# Altium PCB rpi_adapter_mipi_in_out.PcbDoc (part 2 of 2)
Units mil, origin at the board's own origin, x right, y up, seen from the top; angles counter-clockwise.
Board outline 1339.12 x 1250 mil, 4 copper layers (Top Layer, L02_GND, L03_GND, Bottom Layer), stack 36.268 mil thick; 12 components, 26 nets, 96 pads, 205 vias.
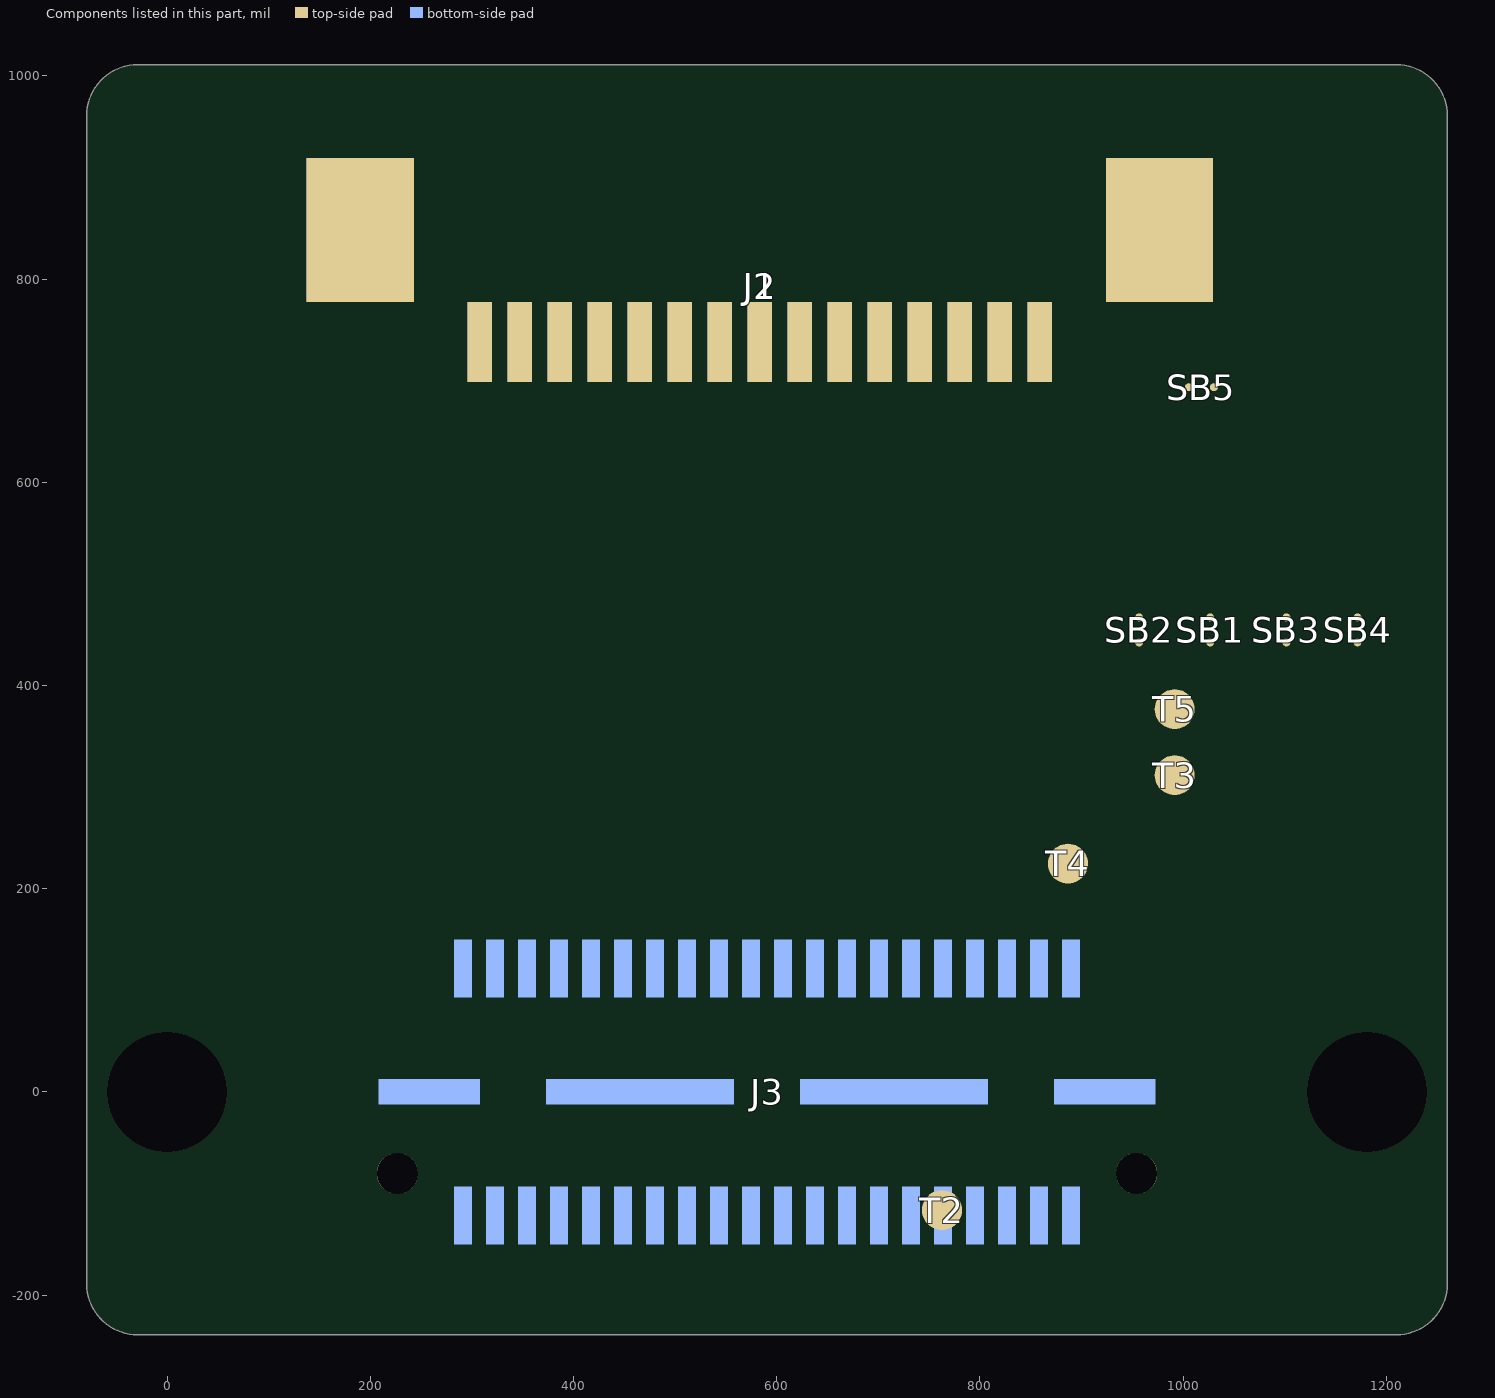
[diagram p4: the components of this part, seen from the top]

## Keep-outs (continued)
L03_GND:
  region: 810.85,490.51 810.85,528.55 810.93,530.3 811.16,532.02 811.54,533.72 812.06,535.39 812.73,537.01 813.53,538.55 814.47,540.02 815.53,541.41 816.71,542.69 818,543.86 819.38,544.94 820.85,545.86 822.4,546.68 824.01,547.35 825.68,547.86 827.38,548.26 829.11,548.47 830.85,548.55 832.6,548.47 834.33,548.26 836.03,547.86 837.69,547.35 839.31,546.68 840.85,545.86 842.33,544.94 843.71,543.86 845,542.69 846.17,541.41 847.24,540.02 848.17,538.55 848.98,537.01 849.65,535.39 850.17,533.72 850.55,532.02 850.78,530.3 850.85,528.55 850.85,490.51 850.78,488.76 850.55,487.02 850.17,485.32 849.65,483.66 848.98,482.05 848.17,480.51 847.24,479.02 846.17,477.64 845,476.36 843.71,475.18 842.33,474.11 840.85,473.18 839.31,472.36 837.69,471.7 836.03,471.18 834.33,470.8 832.6,470.59 830.85,470.51 829.11,470.59 827.38,470.8 825.68,471.18 824.01,471.7 822.4,472.36 820.85,473.18 819.38,474.11 818,475.18 816.71,476.36 815.53,477.64 814.47,479.02 813.53,480.51 812.73,482.05 812.06,483.66 811.54,485.32 811.16,487.02 810.93,488.76 810.85,490.51
  region: 694.85,435.51 694.85,473.55 694.93,475.3 695.16,477.02 695.54,478.72 696.06,480.39 696.73,482.01 697.53,483.55 698.47,485.02 699.53,486.41 700.71,487.69 702,488.86 703.38,489.94 704.85,490.86 706.4,491.68 708.01,492.35 709.68,492.86 711.38,493.26 713.11,493.47 714.85,493.55 716.6,493.47 718.33,493.26 720.03,492.86 721.69,492.35 723.31,491.68 724.85,490.86 726.33,489.94 727.71,488.86 729,487.69 730.17,486.41 731.24,485.02 732.17,483.55 732.98,482.01 733.65,480.39 734.17,478.72 734.55,477.02 734.78,475.3 734.85,473.55 734.85,435.51 734.78,433.76 734.55,432.02 734.17,430.32 733.65,428.66 732.98,427.05 732.17,425.51 731.24,424.02 730.17,422.64 729,421.36 727.71,420.18 726.33,419.11 724.85,418.18 723.31,417.36 721.69,416.7 720.03,416.18 718.33,415.8 716.6,415.59 714.85,415.51 713.11,415.59 711.38,415.8 709.68,416.18 708.01,416.7 706.4,417.36 704.85,418.18 703.38,419.11 702,420.18 700.71,421.36 699.53,422.64 698.47,424.02 697.53,425.51 696.73,427.05 696.06,428.66 695.54,430.32 695.16,432.02 694.93,433.76 694.85,435.51
  region: 491.8,697.65 517.82,697.65 517.82,778.39 491.8,778.39
  region: 690.72,92.1 710.83,92.1 710.83,151.19 690.72,151.19
  region: 470.25,-151.2 490.36,-151.2 490.36,-92.11 470.25,-92.11
  region: 501.75,-151.2 521.86,-151.2 521.86,-92.11 501.75,-92.11
  region: 501.75,92.1 521.86,92.1 521.86,151.19 501.75,151.19
  region: 375.76,-151.2 395.87,-151.2 395.87,-92.11 375.76,-92.11
  region: 609.91,697.65 635.93,697.65 635.93,778.39 609.91,778.39
  region: 382.56,-160.11 420.61,-160.11 422.36,-160.19 424.08,-160.41 425.79,-160.8 427.45,-161.32 429.06,-161.99 430.61,-162.78 432.07,-163.73 433.47,-164.78 434.74,-165.97 435.92,-167.26 436.99,-168.64 437.92,-170.11 438.73,-171.66 439.4,-173.27 439.92,-174.94 440.31,-176.64 440.54,-178.36 440.61,-180.11 440.54,-181.86 440.31,-183.59 439.92,-185.28 439.4,-186.95 438.73,-188.57 437.92,-190.11 436.99,-191.59 435.92,-192.97 434.74,-194.26 433.47,-195.43 432.07,-196.49 430.61,-197.43 429.06,-198.24 427.45,-198.91 425.79,-199.43 424.08,-199.81 422.36,-200.03 420.61,-200.11 382.56,-200.11 380.81,-200.03 379.08,-199.81 377.38,-199.43 375.72,-198.91 374.11,-198.24 372.56,-197.43 371.08,-196.49 369.71,-195.43 368.41,-194.26 367.23,-192.97 366.17,-191.59 365.23,-190.11 364.42,-188.57 363.76,-186.95 363.23,-185.28 362.86,-183.59 362.64,-181.86 362.56,-180.11 362.64,-178.36 362.86,-176.64 363.23,-174.94 363.76,-173.27 364.42,-171.66 365.23,-170.11 366.17,-168.64 367.23,-167.26 368.41,-165.97 369.71,-164.78 371.08,-163.73 372.56,-162.78 374.11,-161.99 375.72,-161.32 377.38,-160.8 379.08,-160.41 380.81,-160.19 382.56,-160.11
  region: 477.04,-160.11 515.09,-160.11 516.84,-160.19 518.56,-160.41 520.27,-160.8 521.93,-161.32 523.54,-161.99 525.09,-162.78 526.55,-163.73 527.95,-164.78 529.22,-165.97 530.4,-167.26 531.47,-168.64 532.4,-170.11 533.21,-171.66 533.88,-173.27 534.4,-174.94 534.79,-176.64 535.02,-178.36 535.09,-180.11 535.02,-181.86 534.79,-183.59 534.4,-185.28 533.88,-186.95 533.21,-188.57 532.4,-190.11 531.47,-191.59 530.4,-192.97 529.22,-194.26 527.95,-195.43 526.55,-196.49 525.09,-197.43 523.54,-198.24 521.93,-198.91 520.27,-199.43 518.56,-199.81 516.84,-200.03 515.09,-200.11 477.04,-200.11 475.29,-200.03 473.56,-199.81 471.86,-199.43 470.2,-198.91 468.59,-198.24 467.04,-197.43 465.56,-196.49 464.19,-195.43 462.89,-194.26 461.71,-192.97 460.65,-191.59 459.71,-190.11 458.9,-188.57 458.24,-186.95 457.71,-185.28 457.34,-183.59 457.12,-181.86 457.04,-180.11 457.12,-178.36 457.34,-176.64 457.71,-174.94 458.24,-173.27 458.9,-171.66 459.71,-170.11 460.65,-168.64 461.71,-167.26 462.89,-165.97 464.19,-164.78 465.56,-163.73 467.04,-162.78 468.59,-161.99 470.2,-161.32 471.86,-160.8 473.56,-160.41 475.29,-160.19 477.04,-160.11
  region: 533.83,402.22 533.83,364.16 533.75,362.41 533.52,360.69 533.14,358.98 532.62,357.32 531.95,355.72 531.15,354.16 530.21,352.7 529.15,351.3 527.97,350.03 526.68,348.85 525.3,347.78 523.83,346.85 522.28,346.05 520.67,345.38 519,344.85 517.3,344.47 515.57,344.23 513.83,344.16 512.08,344.23 510.35,344.47 508.65,344.85 506.99,345.38 505.37,346.05 503.83,346.85 502.35,347.78 500.97,348.85 499.68,350.03 498.51,351.3 497.44,352.7 496.51,354.16 495.7,355.72 495.03,357.32 494.51,358.98 494.13,360.69 493.9,362.41 493.83,364.16 493.83,402.22 493.9,403.97 494.13,405.69 494.51,407.39 495.03,409.05 495.7,410.66 496.51,412.22 497.44,413.69 498.51,415.06 499.68,416.36 500.97,417.55 502.35,418.6 503.83,419.55 505.37,420.35 506.99,421.01 508.65,421.55 510.35,421.91 512.08,422.14 513.83,422.22 515.57,422.14 517.3,421.91 519,421.55 520.67,421.01 522.28,420.35 523.83,419.55 525.3,418.6 526.68,417.55 527.97,416.36 529.15,415.06 530.21,413.69 531.15,412.22 531.95,410.66 532.62,409.05 533.14,407.39 533.52,405.69 533.75,403.97 533.83,402.22
  region: 571.53,-160.11 609.58,-160.11 611.33,-160.19 613.06,-160.41 614.76,-160.8 616.42,-161.32 618.04,-161.99 619.58,-162.78 621.05,-163.73 622.44,-164.78 623.72,-165.97 624.9,-167.26 625.97,-168.64 626.9,-170.11 627.71,-171.66 628.38,-173.27 628.9,-174.94 629.28,-176.64 629.51,-178.36 629.58,-180.11 629.51,-181.86 629.28,-183.59 628.9,-185.28 628.38,-186.95 627.71,-188.57 626.9,-190.11 625.97,-191.59 624.9,-192.97 623.72,-194.26 622.44,-195.43 621.05,-196.49 619.58,-197.43 618.04,-198.24 616.42,-198.91 614.76,-199.43 613.06,-199.81 611.33,-200.03 609.58,-200.11 571.53,-200.11 569.79,-200.03 568.06,-199.81 566.35,-199.43 564.69,-198.91 563.08,-198.24 561.53,-197.43 560.06,-196.49 558.68,-195.43 557.39,-194.26 556.21,-192.97 555.15,-191.59 554.21,-190.11 553.4,-188.57 552.74,-186.95 552.21,-185.28 551.83,-183.59 551.61,-181.86 551.53,-180.11 551.61,-178.36 551.83,-176.64 552.21,-174.94 552.74,-173.27 553.4,-171.66 554.21,-170.11 555.15,-168.64 556.21,-167.26 557.39,-165.97 558.68,-164.78 560.06,-163.73 561.53,-162.78 563.08,-161.99 564.69,-161.32 566.35,-160.8 568.06,-160.41 569.79,-160.19 571.53,-160.11
  region: 564.74,92.1 584.85,92.1 584.85,151.19 564.74,151.19
  region: 596.23,-151.2 616.34,-151.2 616.34,-92.11 596.23,-92.11
  region: 749.85,250.51 749.85,288.55 749.93,290.3 750.16,292.02 750.54,293.72 751.06,295.39 751.73,297.01 752.53,298.55 753.47,300.02 754.53,301.41 755.71,302.69 757,303.86 758.38,304.94 759.85,305.86 761.4,306.68 763.01,307.35 764.68,307.86 766.38,308.26 768.11,308.47 769.85,308.55 771.6,308.47 773.33,308.26 775.03,307.86 776.69,307.35 778.31,306.68 779.85,305.86 781.33,304.94 782.71,303.86 784,302.69 785.17,301.41 786.24,300.02 787.17,298.55 787.98,297.01 788.65,295.39 789.17,293.72 789.55,292.02 789.78,290.3 789.85,288.55 789.85,250.51 789.78,248.76 789.55,247.02 789.17,245.32 788.65,243.66 787.98,242.05 787.17,240.51 786.24,239.02 785.17,237.64 784,236.36 782.71,235.18 781.33,234.11 779.85,233.18 778.31,232.36 776.69,231.7 775.03,231.18 773.33,230.8 771.6,230.59 769.85,230.51 768.11,230.59 766.38,230.8 764.68,231.18 763.01,231.7 761.4,232.36 759.85,233.18 758.38,234.11 757,235.18 755.71,236.36 754.53,237.64 753.47,239.02 752.53,240.51 751.73,242.05 751.06,243.66 750.54,245.32 750.16,247.02 749.93,248.76 749.85,250.51
  region: 659.23,92.1 679.34,92.1 679.34,151.19 659.23,151.19
  region: 407.26,-151.2 427.37,-151.2 427.37,-92.11 407.26,-92.11
  region: 470.25,92.1 490.36,92.1 490.36,151.19 470.25,151.19
  region: 452.43,697.65 478.45,697.65 478.45,778.39 452.43,778.39
  region: 564.74,-151.2 584.85,-151.2 584.85,-92.11 564.74,-92.11
  region: 423.85,475.18 423.85,437.14 423.77,435.39 423.54,433.66 423.16,431.95 422.64,430.3 421.97,428.68 421.17,427.14 420.23,425.68 419.17,424.27 417.99,423.01 416.7,421.82 415.32,420.76 413.85,419.82 412.3,419.01 410.69,418.34 409.02,417.82 407.32,417.43 405.59,417.2 403.85,417.14 402.1,417.2 400.37,417.43 398.67,417.82 397.01,418.34 395.39,419.01 393.85,419.82 392.37,420.76 390.99,421.82 389.7,423.01 388.53,424.27 387.46,425.68 386.53,427.14 385.72,428.68 385.05,430.3 384.53,431.95 384.15,433.66 383.92,435.39 383.85,437.14 383.85,475.18 383.92,476.93 384.15,478.66 384.53,480.36 385.05,482.02 385.72,483.64 386.53,485.18 387.46,486.66 388.53,488.03 389.7,489.34 390.99,490.51 392.37,491.57 393.85,492.51 395.39,493.32 397.01,493.98 398.67,494.51 400.37,494.89 402.1,495.1 403.85,495.18 405.59,495.1 407.32,494.89 409.02,494.51 410.69,493.98 412.3,493.32 413.85,492.51 415.32,491.57 416.7,490.51 417.99,489.34 419.17,488.03 420.23,486.66 421.17,485.18 421.97,483.64 422.64,482.02 423.16,480.36 423.54,478.66 423.77,476.93 423.85,475.18
  region: 596.23,92.1 616.34,92.1 616.34,151.19 596.23,151.19
  region: 373.69,697.65 399.71,697.65 399.71,778.39 373.69,778.39
  region: 319.77,579.99 319.77,541.94 319.69,540.19 319.46,538.47 319.08,536.76 318.56,535.1 317.89,533.49 317.09,531.94 316.15,530.48 315.09,529.09 313.91,527.81 312.62,526.64 311.24,525.56 309.77,524.64 308.22,523.82 306.61,523.15 304.94,522.64 303.24,522.24 301.51,522.01 299.77,521.94 298.02,522.01 296.29,522.24 294.59,522.64 292.93,523.15 291.31,523.82 289.77,524.64 288.29,525.56 286.91,526.64 285.62,527.81 284.45,529.09 283.38,530.48 282.45,531.94 281.64,533.49 280.97,535.1 280.45,536.76 280.07,538.47 279.84,540.19 279.77,541.94 279.77,579.99 279.84,581.74 280.07,583.47 280.45,585.18 280.97,586.84 281.64,588.44 282.45,589.99 283.38,591.47 284.45,592.84 285.62,594.14 286.91,595.32 288.29,596.39 289.77,597.32 291.31,598.14 292.93,598.8 294.59,599.32 296.29,599.69 298.02,599.91 299.77,599.99 301.51,599.91 303.24,599.69 304.94,599.32 306.61,598.8 308.22,598.14 309.77,597.32 311.24,596.39 312.62,595.32 313.91,594.14 315.09,592.84 316.15,591.47 317.09,589.99 317.89,588.44 318.56,586.84 319.08,585.18 319.46,583.47 319.69,581.74 319.77,579.99
  region: 570.54,697.65 596.56,697.65 596.56,778.39 570.54,778.39
  region: 334.32,697.65 360.34,697.65 360.34,778.39 334.32,778.39
Bottom Layer:
  drawing of 29 lines, arcs and shapes, not listed
Keep-Out Layer:
  lines w39.37: -79.01,-188.99 ccw(c-29.01,-188.99) -29.01,-238.99 786.77,-238.99 1210.11,-238.99 ccw(c1210.11,-188.99) 1260.11,-188.99 1260.11,961.01 ccw(c1210.11,961.01) 1210.11,1011.01 746.77,1011.01 -29.01,1011.01 ccw(c-29.01,961.01) -79.01,961.01 -79.01,-188.99

## Other copper
Top Layer:
  region net P3V3D: 848.28,773.04 848.28,710.17 890.41,668.04 998.68,668.04 1015.09,684.45 1015.09,702.73 999.78,718.04 883.28,718.04 878.28,723.04 868.28,733.04 868.28,773.04
  text "TOP LAYER" at 301.07,-656.98 h100
L02_GND:
  text "LAYER2(PWR)" at 264.02,-657.84 h100
L03_GND:
  text "LAYER3(GND PLANE)" at 101.22,-657.84 h100
Bottom Layer:
  region net P3V3D: 106.77,964.68 1131.77,964.68 1181.77,914.68 1181.77,689.68 1151.77,659.68 986.77,659.68 966.77,659.68 951.77,674.68 951.77,709.68 956.77,714.68 986.77,714.68 1096.77,714.68 1121.77,739.68 1121.77,889.55 1081.64,929.68 131.77,929.68 121.77,919.68 121.77,724.68 186.77,659.68 186.77,586.53 185.52,586.53 185.52,-105.07 190.52,-110.07 245.52,-110.07 265.52,-90.07 300.52,-90.07 300.52,-160.07 285.52,-175.07 160.52,-175.07 125.52,-140.07 125.52,641.68 76.77,690.43 76.77,934.68 106.77,964.68
  text "BOTTOM LAYER" at 213.93,-657.42 h100

## Silkscreen, mask and mechanical layers (free items; w line width, h text height)
Top Overlay:
  text "3.3V" at 865.75,630 h60
  text "MIPI Sink" at 472,622.67 h60
  text "D3" at 210.55,541.87 h60
  text "SDA" at 1188.04,509.68 h60 r90
  text "SCL" at 1116.36,509.37 h60 r90
  text "D1" at 745.56,497.98 h60
  text "D4" at 310.93,437.69 h60
  text "D2" at 744.76,433.55 h60
  text "D5" at 420.52,363.48 h60
  text "D0" at 681.46,250.13 h60
  text "EN1" at 980.41,196.41 h60
  text "tinyDualRPi MIPI I/O Rev2" at 379.13,-32.55 h65
  text "EN0" at 803.43,-134.53 h60
  text "TOP SILKSCREEN" at 190.93,-922.18 h100
Bottom Overlay:
  text "MIPI Source" at 831.88,582.8 h100
  text "BOTTOM SILKSCREEN" at 1049.54,-921.4 h100
Top Paste:
  text "TOP PASTEMASK" at 181.99,-752.58 h100
Bottom Paste:
  text "BOTTOM PASTEMASK" at 99.19,-752.11 h100
Top Solder:
  drawing of 17 lines, arcs and shapes, not listed
  text "TOP SOLDERMASK" at 153.46,-835.72 h100
Bottom Solder:
  text "BOTTOM SOLDERMASK" at 55.74,-835.2 h100
Drill Guide:
  the board outline again, w10
Board Shape:
  lines w0: -79.01,-188.99 ccw(c-29.01,-188.99) -29.01,-238.99 786.77,-238.99 1210.11,-238.99 ccw(c1210.11,-188.99) 1260.11,-188.99 1260.11,961.01 ccw(c1210.11,961.01) 1210.11,1011.01 746.77,1011.01 -29.01,1011.01 ccw(c-29.01,961.01) -79.01,961.01 -79.01,-188.99
  text "BOARD OUTLINE" at 193.26,-556.96 h100
Assembly TOP/BOTTOM Top:
  text "TOP ASSEMBLY" at 241.37,-1004.33 h100
Assembly TOP/BOTTOM Bottom:
  text "BOTTOM ASSEMBLY" at 1008.56,-1007.16 h100
Drill Drawing:
  drawing of 232 lines, arcs and shapes, not listed
  text "Layer" at 1748.84,2437.69 h86.73
  text "Name" at 2111.96,2437.69 h86.73
  text "Material" at 2814.35,2437.69 h86.73
  text "Thickness" at 3252.87,2437.69 h86.73
  text "Constant" at 3771.29,2437.69 h86.73
  text "Board Layer Stack" at 4251.09,2437.69 h86.73
  text "Top Overlay" at 2111.96,2264.24 h86.73
  text "Top Solder" at 2111.96,2090.79 h86.73
  text "SM-001" at 2819.81,2090.79 h86.73
  text "0.025mm" at 3267.53,2090.79 h86.73
  text "4" at 3905.19,2090.79 h86.73
  text "1" at 1748.84,1917.33 h86.73
  text "Top Layer" at 2111.96,1917.33 h86.73
  text "CF-004" at 2821.22,1917.33 h86.73
  text "0.035mm" at 3267.53,1917.33 h86.73
  text "Dielectric 1" at 2111.96,1743.88 h86.73
  text "7628*1" at 2832.78,1743.88 h86.73
  text "0.210mm" at 3267.53,1743.88 h86.73
  text "4.05" at 3850.87,1743.88 h86.73
  text "2" at 1748.76,1570.43 h86.73
  text "L02_GND" at 2111.96,1570.43 h86.73
  text "CF-004" at 2821.22,1570.43 h86.73
  text "0.015mm" at 3267.53,1570.43 h86.73
  text "Dielectric 2" at 2111.96,1396.97 h86.73
  text "Core" at 2866.26,1396.97 h86.73
  text "0.400mm" at 3267.53,1396.97 h86.73
  text "4.05" at 3850.87,1396.97 h86.73
  text "3" at 1748.84,1223.52 h86.73
  text "L03_GND" at 2111.96,1223.52 h86.73
  text "CF-004" at 2821.22,1223.52 h86.73
  text "0.015mm" at 3267.53,1223.52 h86.73
  text "Dielectric 3" at 2111.96,1050.07 h86.73
  text "7628*1" at 2832.78,1050.07 h86.73
  text "0.210mm" at 3267.53,1050.07 h86.73
  text "4.05" at 3850.87,1050.07 h86.73
  text "4" at 1748.84,876.62 h86.73
  text "Bottom Layer" at 2111.96,876.62 h86.73
  text "CF-004" at 2821.22,876.62 h86.73
  text "0.035mm" at 3267.53,876.62 h86.73
  text "Bottom Solder" at 2111.96,703.16 h86.73
  text "SM-001" at 2819.81,703.16 h86.73
  text "0.025mm" at 3267.53,703.16 h86.73
  text "4" at 3905.19,703.16 h86.73
  text "Bottom Overlay" at 2111.96,529.71 h86.73
  text "Total board thickness:" at 1748.84,356.26 h86.73
  text "0.970mm" at 3267.53,356.26 h86.73
  text "IMPEDANCE" at 2765.92,80.66 h80
  text "WIDTH" at 3884.92,-26.34 h80
  text "SPACE" at 4512.92,-26.34 h80
  text "LAYER" at 1832.92,-55.34 h80
  text "SINGLE END" at 2387.92,-140.34 h80
  text "DIFF" at 3237.88,-144.7 h80
  text "----" at 2447.62,-372.18 h50
  text "100 OHM" at 3150.89,-378.46 h50
  text "7.55 MILS" at 3812.23,-380.6 h100
  text "7.0 MILS" at 4435.93,-386.75 h100
  text "L1 & L4" at 1805.92,-394.34 h80
  text "Symbol" at 1747.4,-750.55 h84.98
  text "Count" at 2080.09,-750.55 h84.98
  text "Hole Size" at 2425.97,-750.55 h84.98
  text "Plated" at 3107.66,-750.55 h84.98
  text "Hole Type" at 3399.71,-750.55 h84.98
  text "Drill Layer Pair" at 3824.92,-750.55 h84.98
  text "Via/Pad" at 4630.73,-750.55 h84.98
  text "205" at 2080.09,-897.11 h70.82
  text "0.203mm (8.00mil)" at 2425.97,-897.11 h70.82
  text "PTH" at 3107.66,-897.11 h70.82
  text "Round" at 3399.71,-897.11 h70.82
  text "Top Layer - Bottom Layer" at 3824.92,-897.11 h70.82
  text "Via" at 4630.73,-897.11 h70.82
  text "A" at 1718.82,-907.1 h65.14
  text "2" at 2080.09,-1043.66 h70.82
  text "1.020mm (40.16mil)" at 2425.97,-1043.66 h70.82
  text "NPTH" at 3107.66,-1043.66 h70.82
  text "Round" at 3399.71,-1043.66 h70.82
  text "Top Layer - Bottom Layer" at 3824.92,-1043.66 h70.82
  text "Pad" at 4630.73,-1043.66 h70.82
  text "B" at 1718.82,-1053.65 h65.14
  text "2" at 2080.09,-1190.22 h70.82
  text "3.000mm (118.11mil)" at 2425.97,-1190.22 h70.82
  text "NPTH" at 3107.66,-1190.22 h70.82
  text "Round" at 3399.71,-1190.22 h70.82
  text "Top Layer - Bottom Layer" at 3824.92,-1190.22 h70.82
  text "Pad" at 4630.73,-1190.22 h70.82
  text "C" at 1718.82,-1200.21 h65.14
  text "209 Total" at 2080.09,-1336.78 h70.82

## Dimensions
1210.11,-188.99 to 1394.29,-373.17 on Drill Drawing
-29.01,1011.01 to -29.01,-238.99 on Drill Drawing
-79.01,961.01 to 1260.11,961.01 on Drill Drawing

## Text inside footprints (layer, text, board x,y; h text height)
J3: Bottom Overlay "2" at 261.77,149.68 h60; Bottom Overlay "39" at 968.02,-193 h60; Bottom Overlay "40" at 970.45,144.73 h60; Assembly TOP/BOTTOM Bottom "40" at 1006.77,140.35 h60; Assembly TOP/BOTTOM Bottom "2" at 251.83,139.68 h60; Assembly TOP/BOTTOM Bottom "39" at 996.77,-174.65 h60